# EAGLE board picoAvaR14 (EAGLE 6.1)
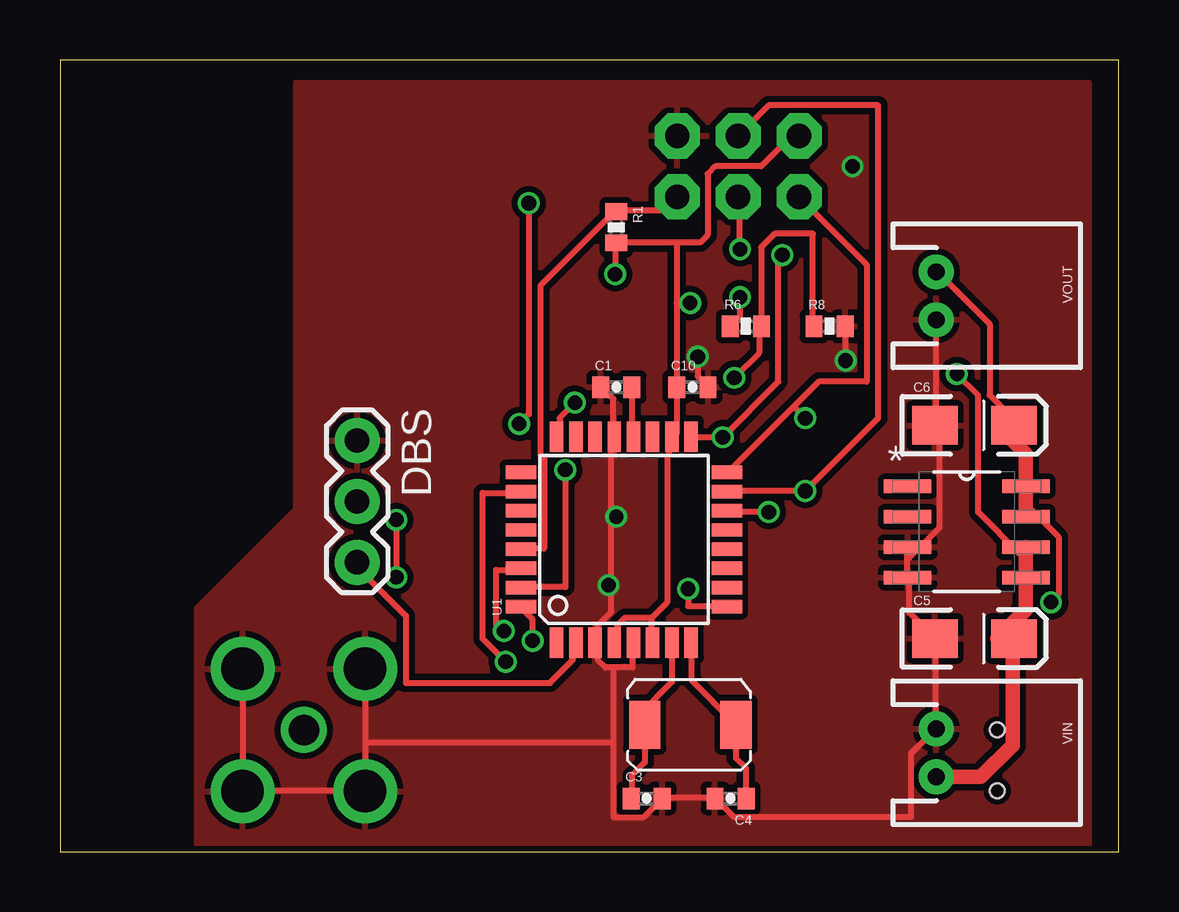
[diagram p0: board, top side]
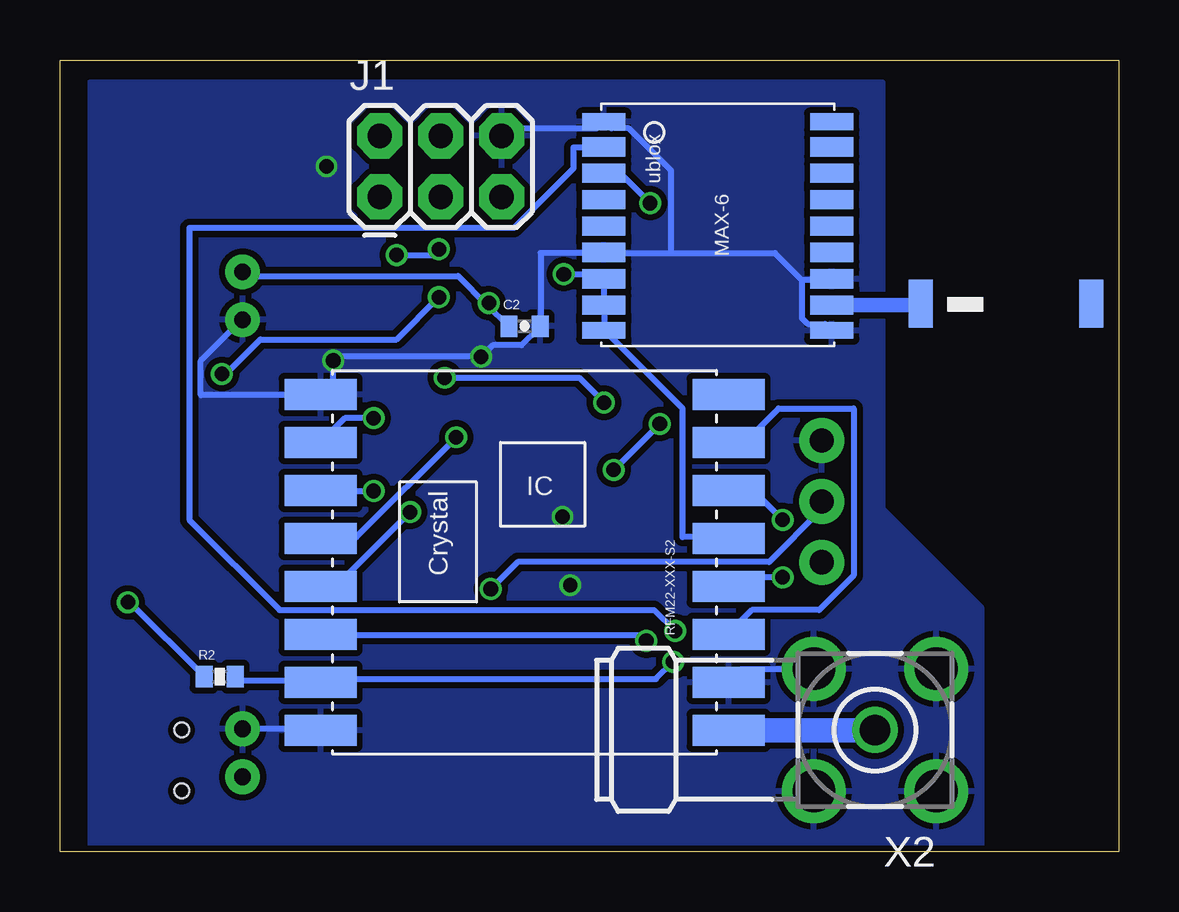
[diagram p1: board, bottom side, seen from below]

Size 44.12 x 33.01 mm. Coordinates in mm from the lower left corner, seen from the top.
Outline: 0,0 44.12,0 44.12,33.01 0,33.01 0,0
Copper layers (1*16): Top 0.035mm / dielectric 1.5mm / Bottom 0.035mm
Design rules: minimum track width 6mil, minimum drill 12mil, track to track 6mil, track to pad 6mil, pad to pad 6mil, via to via 6mil, smd to smd 0mil, copper to edge 10mil, drill to drill 10mil, minimum pad ring 10mil, minimum via ring 6mil, stop-mask expansion 2mil, vias tented up to drill 100mil, thermal gap 10mil
Net classes: 0 default: width 0.203 mm; 1 vcc: width 0.254 mm
Holes 0.6 mm at 39.05,5.08 39.05,2.54

## Footprints (pad centres in the part's own frame; a part is rotated, then mirrored left to right if it is on the bottom)
0402-CAP = smd 0.7 x 0.9: 1 -0.65,0; 2 0.65,0
EIA3216-KIT = smd 1.9 x 1.6: A 1.65,0; C -1.65,0
1X03 = drill 1.016 pad 1.88: 1 0,0; 2 2.54,0; 3 5.08,0
2X3 = drill 1.016 pad 1.88 octagon: 1 0,0; 2 0,2.54; 3 2.54,0; 4 2.54,2.54; 5 5.08,0; 6 5.08,2.54
STAND-OFF = hole 3.302: 0,0
0402-RES = smd 0.7 x 0.9: 1 -0.65,0; 2 0.65,0
RFM22-XXX-S2 = smd 3 x 1.3: 1 -8.5,7; 2 -8.5,5; 3 -8.5,3; 4 -8.5,1; 5 -8.5,-1; 6 -8.5,-3; 7 -8.5,-5; 8 -8.5,-7; 9 8.5,-7; 10 8.5,-5; 11 8.5,-3; 12 8.5,-1; 13 8.5,1; 14 8.5,3; 15 8.5,5; 16 8.5,7
TQFP32-08 = smd 1.27 x 0.559: 1 -4.293,2.8; 2 -4.293,2; 3 -4.293,1.2; 4 -4.293,0.4; 5 -4.293,-0.4; 6 -4.293,-1.2; 7 -4.293,-2; 8 -4.293,-2.8; 17 4.293,-2.8; 18 4.293,-2; 19 4.293,-1.2; 20 4.293,-0.4; 21 4.293,0.4; 22 4.293,1.2; 23 4.293,2; 24 4.293,2.8 | smd 0.559 x 1.27: 9 -2.8,-4.293; 10 -2,-4.293; 11 -1.2,-4.293; 12 -0.4,-4.293; 13 0.4,-4.293; 14 1.2,-4.293; 15 2,-4.293; 16 2.8,-4.293; 25 2.8,4.293; 26 2,4.293; 27 1.2,4.293; 28 0.4,4.293; 29 -0.4,4.293; 30 -1.2,4.293; 31 -2,4.293; 32 -2.8,4.293
SOIC127P600X175-8N = smd 1.981 x 0.559: 1 -2.464,1.905; 2 -2.464,0.635; 3 -2.464,-0.635; 4 -2.464,-1.905; 5 2.464,-1.905; 6 2.464,-0.635; 7 2.464,0.635; 8 2.464,1.905
UBLOX_MAX-6 = smd 1.8 x 0.7: 1_GND 4.95,-4.4; 9_V_RESET 4.95,4.3; 10_GND -4.55,4.3; 18_RESERVED -4.55,-4.4 | smd 1.8 x 0.8: 2_TXD1 4.95,-3.35; 3_RXD1 4.95,-2.25; 4_TIMEPULSE 4.95,-1.15; 5_EXTINT0 4.95,-0.05; 6_V_BCKP 4.95,1.05; 7_VCC_IO 4.95,2.15; 8_VCC 4.95,3.25; 11_RF_IN -4.55,3.25; 12_GND -4.55,2.15; 13_ANTON -4.55,1.05; 14_VCC_RF -4.55,-0.05; 15_RESERVED -4.55,-1.15; 16_SDA2 -4.55,-2.25; 17_SCL2 -4.55,-3.35
ABRACON_ABM3_CRYSTAL = smd 1.3 x 2: P$1 -3.4,0.1; P$2 0.4,0.1
JTI_ANTENNA-1575AT43A40 = smd 1 x 2: FEED -3.81,-1.27; NC 3.29,-1.27
JST-2-PTH = drill 0.7 pad 1.448: 1 -1,0; 2 1,0
BU-SMA-H = drill 1.27: 1 0,0 | drill 1.778: 2 -2.55,2.55; 3 2.55,2.55; 4 2.55,-2.55; 5 -2.55,-2.55

## Placement (x,y rotation side)
C1  0.1uF  [0402-CAP]  23.18,19.37 0 top
C2  0.1uF  [0402-CAP]  24.77,21.91 0 bottom
C3  18pF  [0402-CAP]  24.45,2.22 0 top
C4  18pF  [0402-CAP]  27.94,2.22 180 top
C5  [EIA3216-KIT]  38.1,8.89 0 top
C6  4.7uF  [EIA3216-KIT]  38.1,17.78 0 top
C10  0.1uF  [0402-CAP]  26.35,19.37 0 top
DBS  [1X03]  12.38,17.14 270 top
J1  AVR_SPI_PRG_6PTH  [2X3]  30.8,27.3 0 bottom
JP1  STAND-OFF  [STAND-OFF]  -29.53,44.45 0 top  (outside the outline)
JP2  STAND-OFF  [STAND-OFF]  -35.88,44.45 0 top  (outside the outline)
R1  10k  [0402-RES]  23.18,26.04 270 top
R2  10k  [0402-RES]  37.47,7.3 0 bottom
R6  100k  [0402-RES]  28.58,21.91 0 top
R8  10k  [0402-RES]  32.07,21.91 0 top
RFM22-XXX-S2  RFM22  [RFM22-XXX-S2]  24.77,12.06 180 bottom
U1  ATMEGA328  [TQFP32-08]  23.5,13.02 90 top
U2  TPS76633D  [SOIC127P600X175-8N]  37.78,13.34 0 top
U$1  UBLOX_MAX-6  [UBLOX_MAX-6]  16.51,26.04 180 bottom
U$2  ABRACON_ABM3_CRYSTAL  [ABRACON_ABM3_CRYSTAL]  24.77,5.4 180 top
U$3  JTI_ANTENNA-1575AT43A40  [JTI_ANTENNA-1575AT43A40]  4.45,24.13 0 bottom
VIN  [JST-2-PTH]  36.51,4.13 270 top
VOUT  [JST-2-PTH]  36.51,23.18 270 top
X2  BU-SMA-H  [BU-SMA-H]  10.16,5.08 180 bottom

## Library data of the parts
C1-C6 C10 DBS J1 JP1 JP2 R1 R2 R6 R8 RFM22-XXX-S2 U1 VIN VOUT = SparkFun
U2 = ava; DESCRIPTION: ULTRALOW QUIESCENT CURRENT 250-mA LOW DROPOUT VOLTAGE REGULATORS; MPN: TPS76633D; OC_FARNELL: 8461422; OC_NEWARK: 77C1060; PACKAGE: SOIC-8; SUPPLIER: Texas Instruments
U$1-U$3 = ava
X2 = con-coax; OC_FARNELL: unknown; OC_NEWARK: unknown

## Nets
AREF: C1.2 U1.20
GND [vcc]: C1.1 C2.2 C3.2 C4.2 C5.C C6.C C10.2 DBS.1 J1.6 R8.2 RFM22-XXX-S2.2 RFM22-XXX-S2.9 RFM22-XXX-S2.16 U1.3 U1.5 U1.21 U2.3 U2.4 U$1.1_GND U$1.6_V_BCKP U$1.10_GND U$1.12_GND VIN.1 VOUT.2 X2.2 X2.3 X2.4 X2.5
MISO: J1.1 RFM22-XXX-S2.10 U1.16
MOSI: J1.4 RFM22-XXX-S2.11 U1.15
N$3: RFM22-XXX-S2.1 X2.1
N$4: U$1.11_RF_IN U$3.FEED
N$5: RFM22-XXX-S2.3 RFM22-XXX-S2.7
N$6: RFM22-XXX-S2.4 RFM22-XXX-S2.6
N$9: C3.1 U1.7 U$2.P$2
N$10: C4.1 U1.8 U$2.P$1
NSS_RX: DBS.2 U1.9
NSS_TX: DBS.3 U1.2
RESET: J1.5 R1.1 U1.29
RFM22_NIRQ: RFM22-XXX-S2.14 U1.32
RFM22_NSEL: RFM22-XXX-S2.13 U1.14
RFM22_SDN: R2.2 RFM22-XXX-S2.15 U1.26
SCK: J1.3 RFM22-XXX-S2.12 U1.17
UBLOX_RXD: U1.31 U$1.3_RXD1
UBLOX_TXD: U1.30 U$1.2_TXD1
VBATT [vcc]: C5.A R6.1 U2.5 U2.6 VIN.2
VBATTADC: R6.2 R8.1 U1.24
VCC: C2.1 C6.A C10.1 J1.2 R1.2 R2.1 RFM22-XXX-S2.5 U1.4 U1.6 U1.18 U2.7 U2.8 U$1.7_VCC_IO U$1.8_VCC U$1.9_V_RESET VOUT.1

## Tracks (layer width: path | path; a pad name or v marks a point on that pad's centre or on a via)
AREF
  Top 0.254: C1.2 23.83,17.36 | 23.83,17.36 23.83,17.16 23.81,17.14 | U1.20 23.93,17.36 23.83,17.36
GND  (via drill 0.6, 0.61)
  Top 0.254: C1.1 22.57,19.36 23.05,18.88 23.05,17.36 U1.21 23.05,17.2 22.97,17.12 22.97,10 22.41,9.44 22.41,8.8 U1.3 22.33,8.72 22.41,8.64 22.41,8 22.73,7.68 23.05,7.68 | 23.05,7.68 23.85,7.68 23.85,8.72 U1.5 | 23.05,7.68 23.05,4.56 | 23.05,4.56 23.05,1.44 24.33,1.44 25.05,2.16 C3.2 25.13,2.24 27.21,2.24 C4.2 27.37,2.16 28.09,1.44 35.45,1.44 35.45,4.08 36.41,5.04 VIN.1 36.49,5.2 36.49,8.8 C5.C 36.41,8.96 35.37,10 35.37,11.36 U2.4 35.29,11.52 35.29,12.24 | 12.33,17.12 DBS.1 | 7.61,7.68 X2.5 7.61,7.52 7.61,2.56 X2.2 7.69,2.56 12.65,2.56 X2.3 12.73,2.64 12.73,4.56 | 12.73,4.56 12.73,7.6 X2.4 | 12.73,4.56 23.05,4.56 | VOUT.2 36.49,22.16 36.49,17.84 C6.C 36.49,17.68 36.65,17.52 36.65,13.52 35.37,12.24 35.29,12.24 | 35.29,12.24 35.29,12.64 U2.3 | v32.73,20.48 32.73,21.84 R8.2 | v26.57,20.64 26.57,19.84 26.97,19.44 C10.2
  Bottom 0.254: RFM22-XXX-S2.2 16.25,7.12 15.77,7.6 12.73,7.6 X2.4 | VIN.1 36.49,5.12 33.29,5.12 RFM22-XXX-S2.16 | J1.6 25.69,29.92 25.45,30.16 21.77,30.16 21.53,30.4 U$1.1_GND 21.37,30.4 21.13,30.16 20.41,30.16 18.65,28.4 18.65,24.96 | 13.21,23.84 13.21,22.24 12.97,22 12.25,22 12.01,21.76 U$1.10_GND | 13.21,23.84 12.01,23.84 U$1.12_GND | 13.21,23.84 14.33,24.96 18.65,24.96 | 18.65,24.96 21.37,24.96 U$1.6_V_BCKP 21.53,24.96 24.09,24.96 24.09,21.92 C2.2 24.17,21.84 24.89,21.12 26.09,21.12 v26.57,20.64 32.57,20.64 v32.73,20.48 32.73,19.12 33.21,19.12 RFM22-XXX-S2.9 33.37,19.04 38.25,19.04 38.25,20.48 36.57,22.16 VOUT.2
  other vias: 33.02,28.57 23.18,13.97 22.86,11.11
  pour Top (isolate 0.254): 5.71,0 5.71,10.16 9.84,14.29 9.84,32.07 42.86,32.07 42.86,0
  pour Bottom (isolate 0.254): 5.71,0 5.71,10.16 9.84,14.29 9.84,32.07 42.86,32.07 42.86,0
MISO  (via drill 0.61)
  Top 0.254: 30.57,18.56 31.61,19.6 33.61,19.6 33.61,24.48 30.81,27.28 J1.1 | 30.57,18.56 27.85,15.84 U1.16 | 30.57,18.56 v31.05,18.08
  Bottom 0.254: v31.05,18.08 32.25,18.08 33.21,17.12 RFM22-XXX-S2.10
MOSI  (via drill 0.61)
  Top 0.254: U1.15 27.85,15.04 v31.05,15.04 34.09,18.08 34.09,31.12 29.53,31.12 J1.4
  Bottom 0.254: v31.05,15.04 33.21,15.04 RFM22-XXX-S2.11
N$3
  Bottom 0.813: 10.17,5.07 X2.1
  Bottom 1.016: RFM22-XXX-S2.1 10.17,5.07
N$4
  Bottom 0.254: 8.33,22.79 U$3.FEED
  Bottom 0.61: U$1.11_RF_IN 8.33,22.79
N$5
  Bottom 0.254: RFM22-XXX-S2.3 16.25,9.12 15.29,10.08 12.49,10.08 11.05,11.52 11.05,18.48 14.17,18.48 15.53,17.12 16.25,17.12 RFM22-XXX-S2.7
N$6  (via drill 0.61)
  Top 0.254: v14.01,13.84 v14.01,11.44
  Bottom 0.254: v14.01,11.44 15.93,11.44 16.25,11.12 RFM22-XXX-S2.4 | v14.01,13.84 15.21,15.04 16.25,15.04 RFM22-XXX-S2.6
N$9
  Top 0.254: U1.7 25.49,7.08 24.13,5.71 24.13,5.53 U$2.P$2 24.37,3.73 23.81,3.17 23.81,2.24 | 23.81,2.24 C3.1 | C3.1 23.77,2.24 23.81,2.24
N$10
  Top 0.254: U1.8 26.3,7.17 U$2.P$1 28.17,3.9 28.58,3.49 28.58,2.24 | 28.58,2.24 28.58,2.22 | C4.1 28.57,2.24 28.58,2.24
NSS_RX  (via drill 0.61)
  Top 0.254: v26.17,10.96 26.17,10.24 27.77,10.24 U1.9
  Bottom 0.254: v26.17,10.96 25.05,12.08 14.57,12.08 12.41,14.24 12.41,14.56 DBS.2
NSS_TX
  Top 0.254: U1.2 21.45,8.72 21.37,8.64 21.37,8 20.41,7.04 14.41,7.04 14.41,9.84 12.41,11.84 12.41,12 DBS.3
RESET
  Top 0.254: J1.5 25.69,27.28 25.69,26.72 23.21,26.72 R1.1 23.05,26.64 20.01,23.6 20.01,16.56 20.17,16.4 20.17,12.64 19.21,12.64 U1.29
RFM22_NIRQ  (via drill 0.61)
  Top 0.254: v19.69,8.8 19.69,9.68 19.21,10.16 U1.32
  Bottom 0.254: v19.69,8.8 19.93,9.04 33.21,9.04 RFM22-XXX-S2.14
RFM22_NSEL  (via drill 0.61)
  Top 0.254: v29.53,14.16 27.85,14.16 U1.14
  Bottom 0.254: v29.53,14.16 32.57,11.12 33.21,11.12 RFM22-XXX-S2.13
RFM22_SDN  (via drill 0.61)
  Top 0.254: v18.57,7.92 17.61,8.88 17.61,14.96 19.13,14.96 U1.26
  Bottom 0.254: R2.2 36.81,7.28 36.65,7.12 33.29,7.12 RFM22-XXX-S2.15 33.21,7.2 19.29,7.2 v18.57,7.92
SCK  (via drill 0.61)
  Top 0.254: U1.17 26.33,17.28 v27.61,17.28 29.93,19.6 29.93,24.72 v30.09,24.88 | v28.33,25.12 28.33,27.28 J1.3
  Bottom 0.254: v27.61,17.28 31.77,13.12 33.21,13.12 RFM22-XXX-S2.12 | v28.33,25.12 28.57,24.88 v30.09,24.88
UBLOX_RXD  (via drill 0.61)
  Top 0.254: v21.05,15.92 21.05,11.04 19.21,11.04 U1.31 | v19.13,17.84 19.53,18.24 v19.53,27.04
  Bottom 0.254: v19.13,17.84 v21.05,15.92 | v19.53,27.04 20.73,28.24 21.45,28.24 U$1.3_RXD1
UBLOX_TXD  (via drill 0.61)
  Top 0.254: v18.49,9.2 18.17,9.52 18.17,11.76 19.13,11.76 U1.30
  Bottom 0.254: v18.49,9.2 19.37,10.08 34.97,10.08 38.73,13.84 38.73,26 25.21,26 22.73,28.48 22.73,29.36 21.53,29.36 U$1.2_TXD1
VBATT  (via drill 0.61)
  Top 0.254: v28.33,23.12 28.33,22.32 R6.1 | v37.37,19.92 38.25,19.04 38.25,14.16 40.01,12.4 40.25,12.4
  Top 0.61: C5.A 39.05,8.89 40.25,10.08 U2.5 40.25,12.4 U2.6 | C5.A 40.32,8.89 | VIN.2 38.37,3.13 39.69,4.45 39.69,8.83 C5.A
  Bottom 0.254: v28.33,23.12 30.09,21.36 35.77,21.36 37.21,19.92 v37.37,19.92
VBATTADC  (via drill 0.61)
  Top 0.254: R8.1 31.37,21.92 31.37,25.76 29.77,25.76 29.21,25.2 R6.2 29.13,21.84 29.13,20.8 v28.09,19.76 | v21.45,18.72 20.81,18.08 20.81,17.44 20.73,17.36 U1.24
  Bottom 0.254: v21.45,18.72 22.49,19.76 v28.09,19.76
VCC  (via drill 0.61)
  Top 0.254: J1.2 30.48,29.84 29.21,28.57 27.3,28.57 26.99,28.26 26.99,25.72 26.67,25.4 25.69,25.4 | 25.69,25.4 R1.2 23.13,25.28 v23.13,24.08 | 25.57,17.32 25.7,17.45 C10.1 25.69,19.44 25.69,22.88 | 25.57,17.32 25.4,17.14 | 24.65,9.76 23.53,9.76 23.21,9.44 23.21,8.88 23.13,8.8 U1.4 | 24.65,9.76 24.65,8.8 U1.6 | 25.57,17.32 25.53,17.36 U1.18 25.37,17.04 25.37,16.56 25.29,16.48 25.29,10.4 24.65,9.76 | 25.69,25.4 25.69,22.88 | v41.29,10.4 41.61,10.72 41.61,13.12 40.49,14.24 U2.7 | C6.A 39.69,18.08 38.73,19.04 38.73,22 36.57,24.16 VOUT.1 | v26.25,22.88 25.69,22.88
  Top 0.61: C6.A 39.69,17.72 39.69,17.14 40.25,16.59 U2.8 U2.7
  Bottom 0.254: RFM22-XXX-S2.5 16.33,13.12 18.17,13.12 18.17,18.48 21.37,21.68 U$1.9_V_RESET 21.45,21.76 21.45,22.72 U$1.8_VCC 21.45,22.88 21.45,23.84 U$1.7_VCC_IO 21.53,24 21.61,24.08 v23.13,24.08 | R2.1 41.21,10.4 v41.29,10.4 | 26.33,22.8 27.53,24 36.33,24 36.49,24.16 VOUT.1 | 26.33,22.8 25.45,21.92 C2.1 | v26.25,22.88 26.33,22.8